# Altium PCB 24CH.PcbDoc (part 1 of 2)
Units mm, origin at the board's own origin, x right, y up, seen from the top; angles counter-clockwise.
Board outline 96.5 x 64.4 mm, 2 copper layers (F.Cu, B.Cu), stack 1.581 mm thick; 140 components, 144 nets, 455 pads, 160 vias.
Unrouted connection lines stored in the file: 94.
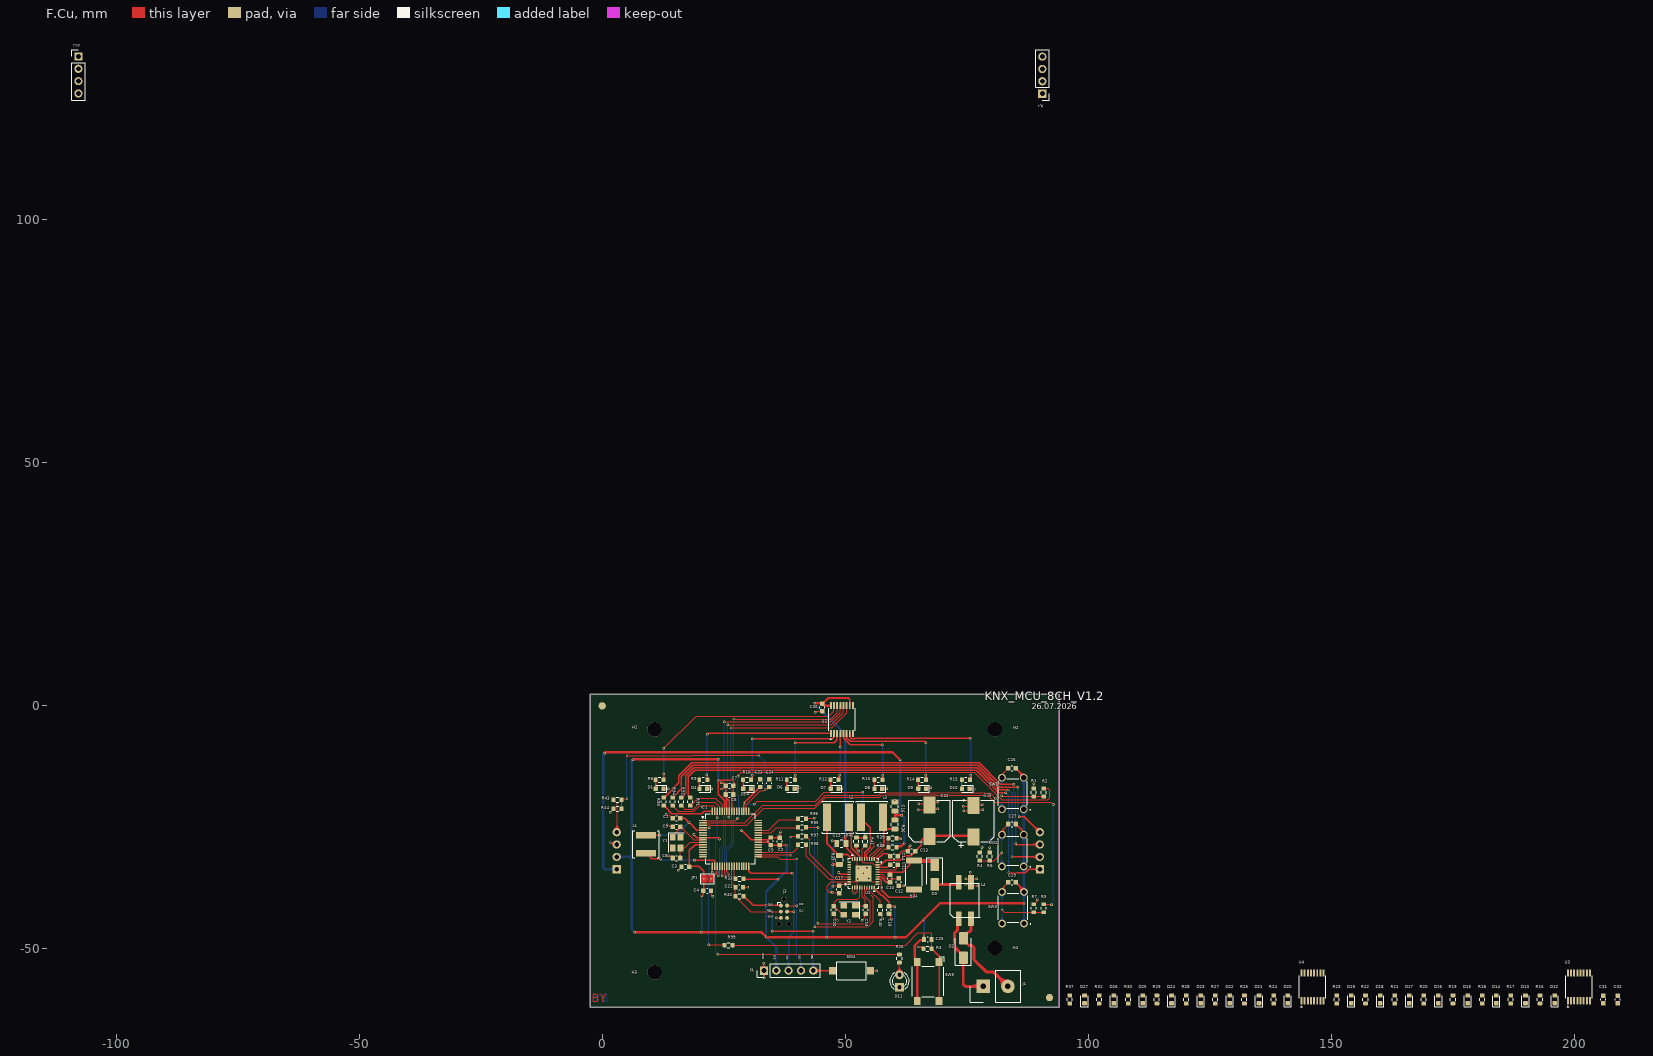
[diagram p0: F.Cu view]
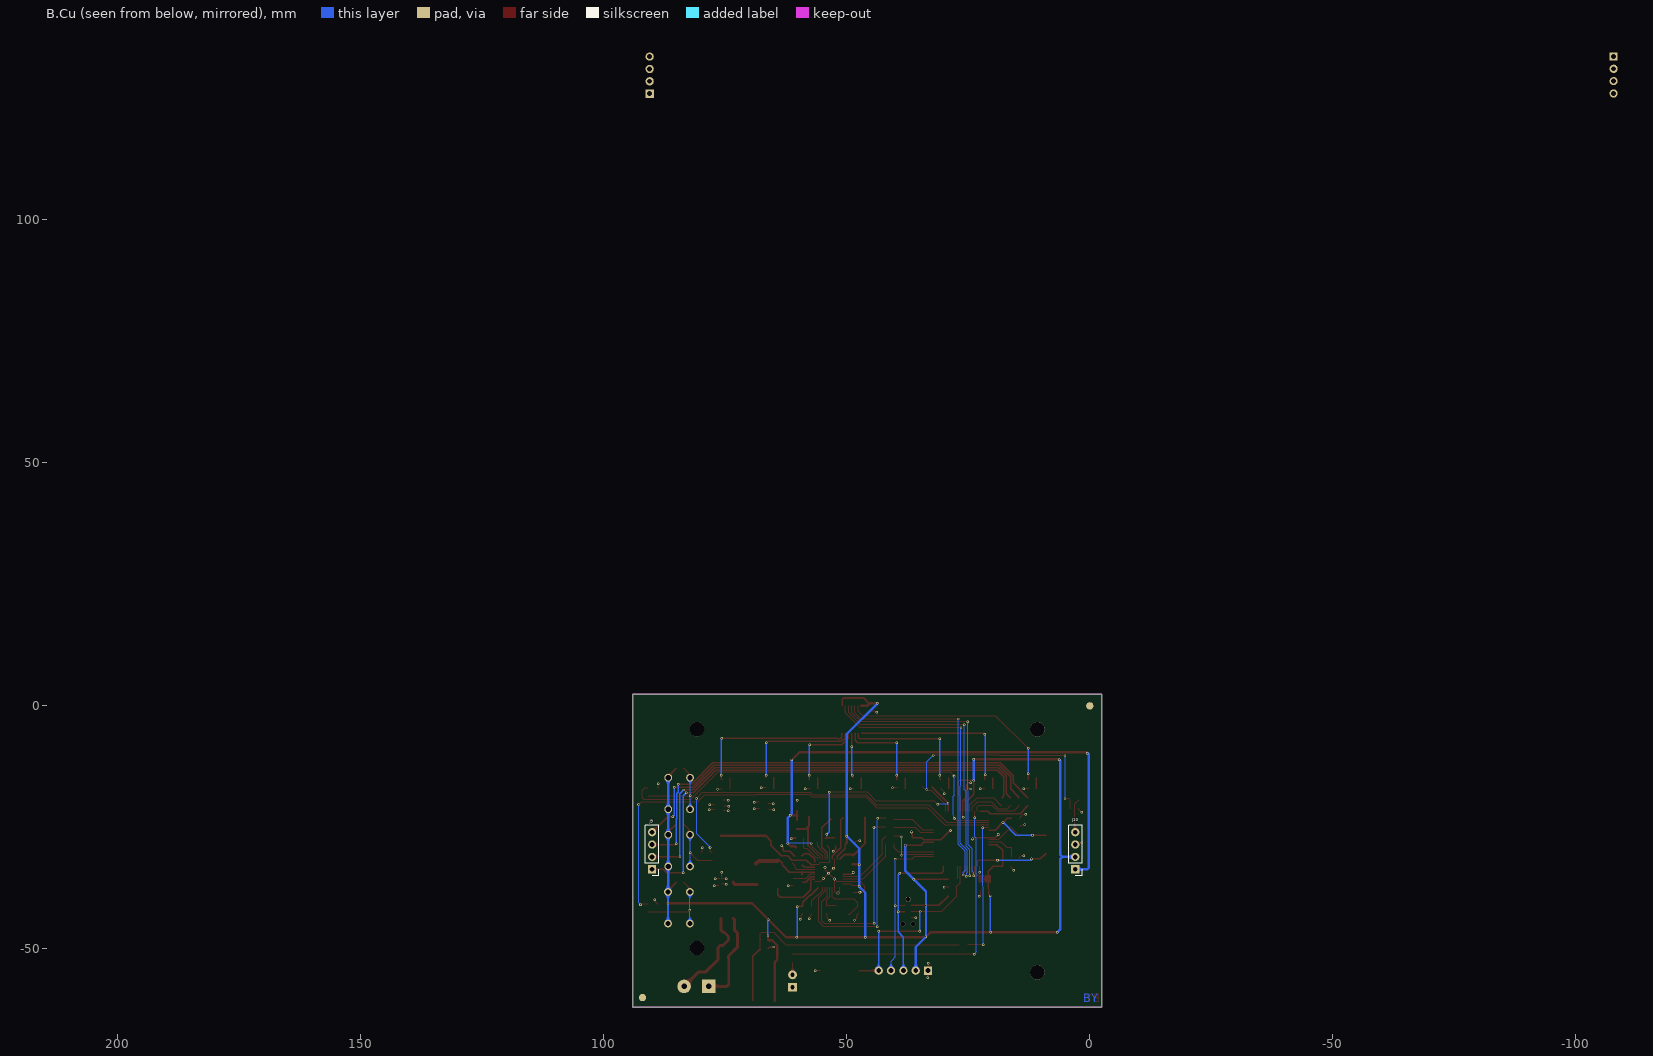
[diagram p1: B.Cu view, seen from below]

## Layer stack, top to bottom
F.Mask: solder mask 0.0102, Solder Resist, Dk 3.5
F.Cu: signal copper 0.0356
Dielectric 1: dielectric 1.51, FR-4, Dk 4.8
B.Cu: signal copper 0.0356
B.Mask: solder mask 0.0102, Solder Resist, Dk 3.5

## Board outline
-2.45,-62 -2.45,2.4 94.05,2.4 94.05,-62

## Design rules (kind name [scope] priority, off if disabled: settings)
Clearance "Clearence 0,5_Polygon" [InNamedPolygon('F.Cu--2') OR InNamedPolygon('B.Cu--2') OR InNamedPolygon('F.Cu--3') OR InNamedPolygon('B.Cu--3')] p1: gap=0.5 ignorepadtopadclearanceinfootprint=FALSE
Clearance "Clearence 0,4_Polygon" [InNamedPolygon('F.Cu--1') OR InNamedPolygon('B.Cu--1')] p2: gap=0.4 ignorepadtopadclearanceinfootprint=FALSE
Clearance "Clearence 0,3_Polygon" [InNamedPolygon('F.Cu-') OR InNamedPolygon('B.Cu-')] p3: gap=0.3 ignorepadtopadclearanceinfootprint=FALSE
Clearance [All] p4: gap=0.2 ignorepadtopadclearanceinfootprint=TRUE
ComponentClearance [All] p1: gap=0 collisioncheckmode=3 verticalgap=0.01 showdistances=FALSE
MinimumSolderMaskSliver [All] p1: minsoldermaskwidth=0
PolygonConnect Polygon_B.Cu--3_ConnectDirect [IsNamedPolygon('B.Cu--3') vs IsVia] p1: connectstyle=Direct reliefconductorwidth=0.254 reliefentries=4 polygonreliefangle="90 Angle" airgapwidth=0.254
PolygonConnect Polygon_B.Cu--3_ConnectRelief45 [IsNamedPolygon('B.Cu--3') vs (IsThruPin or IsSMTPin) and (PadShape_AllLayers = 'Round')] p2: connectstyle=Relief reliefconductorwidth=0.4 reliefentries=4 polygonreliefangle="45 Angle" airgapwidth=0.4
PolygonConnect Polygon_B.Cu--3_ConnectRelief90 [IsNamedPolygon('B.Cu--3') vs (IsThruPin or IsSMTPin) and (PadShape_AllLayers <> 'Round')] p3: connectstyle=Relief reliefconductorwidth=0.4 reliefentries=4 polygonreliefangle="90 Angle" airgapwidth=0.4
PolygonConnect Polygon_F.Cu--3_ConnectDirect [IsNamedPolygon('F.Cu--3') vs IsVia] p4: connectstyle=Direct reliefconductorwidth=0.254 reliefentries=4 polygonreliefangle="90 Angle" airgapwidth=0.254
PolygonConnect Polygon_F.Cu--3_ConnectRelief45 [IsNamedPolygon('F.Cu--3') vs (IsThruPin or IsSMTPin) and (PadShape_AllLayers = 'Round')] p5: connectstyle=Relief reliefconductorwidth=0.4 reliefentries=4 polygonreliefangle="45 Angle" airgapwidth=0.4
PolygonConnect Polygon_F.Cu--3_ConnectRelief90 [IsNamedPolygon('F.Cu--3') vs (IsThruPin or IsSMTPin) and (PadShape_AllLayers <> 'Round')] p6: connectstyle=Relief reliefconductorwidth=0.4 reliefentries=4 polygonreliefangle="90 Angle" airgapwidth=0.4
PolygonConnect Polygon_B.Cu--2_ConnectDirect [IsNamedPolygon('B.Cu--2') vs IsVia] p7: connectstyle=Direct reliefconductorwidth=0.254 reliefentries=4 polygonreliefangle="90 Angle" airgapwidth=0.254
PolygonConnect Polygon_B.Cu--2_ConnectRelief45 [IsNamedPolygon('B.Cu--2') vs (IsThruPin or IsSMTPin) and (PadShape_AllLayers = 'Round')] p8: connectstyle=Relief reliefconductorwidth=0.4 reliefentries=4 polygonreliefangle="45 Angle" airgapwidth=0.4
PolygonConnect Polygon_B.Cu--2_ConnectRelief90 [IsNamedPolygon('B.Cu--2') vs (IsThruPin or IsSMTPin) and (PadShape_AllLayers <> 'Round')] p9: connectstyle=Relief reliefconductorwidth=0.4 reliefentries=4 polygonreliefangle="90 Angle" airgapwidth=0.4
PolygonConnect Polygon_F.Cu--2_ConnectDirect [IsNamedPolygon('F.Cu--2') vs IsVia] p10: connectstyle=Direct reliefconductorwidth=0.254 reliefentries=4 polygonreliefangle="90 Angle" airgapwidth=0.254
PolygonConnect Polygon_F.Cu--2_ConnectRelief45 [IsNamedPolygon('F.Cu--2') vs (IsThruPin or IsSMTPin) and (PadShape_AllLayers = 'Round')] p11: connectstyle=Relief reliefconductorwidth=0.4 reliefentries=4 polygonreliefangle="45 Angle" airgapwidth=0.4
PolygonConnect Polygon_F.Cu--2_ConnectRelief90 [IsNamedPolygon('F.Cu--2') vs (IsThruPin or IsSMTPin) and (PadShape_AllLayers <> 'Round')] p12: connectstyle=Relief reliefconductorwidth=0.4 reliefentries=4 polygonreliefangle="90 Angle" airgapwidth=0.4
PolygonConnect Polygon_B.Cu--1_ConnectDirect [IsNamedPolygon('B.Cu--1') vs IsVia] p13: connectstyle=Direct reliefconductorwidth=0.254 reliefentries=4 polygonreliefangle="90 Angle" airgapwidth=0.254
PolygonConnect Polygon_B.Cu--1_ConnectRelief45 [IsNamedPolygon('B.Cu--1') vs (IsThruPin or IsSMTPin) and (PadShape_AllLayers = 'Round')] p14: connectstyle=Relief reliefconductorwidth=0.4 reliefentries=4 polygonreliefangle="45 Angle" airgapwidth=0.4
PolygonConnect Polygon_B.Cu--1_ConnectRelief90 [IsNamedPolygon('B.Cu--1') vs (IsThruPin or IsSMTPin) and (PadShape_AllLayers <> 'Round')] p15: connectstyle=Relief reliefconductorwidth=0.4 reliefentries=4 polygonreliefangle="90 Angle" airgapwidth=0.4
PolygonConnect Polygon_F.Cu--1_ConnectDirect [IsNamedPolygon('F.Cu--1') vs IsVia] p16: connectstyle=Direct reliefconductorwidth=0.254 reliefentries=4 polygonreliefangle="90 Angle" airgapwidth=0.254
PolygonConnect Polygon_F.Cu--1_ConnectRelief45 [IsNamedPolygon('F.Cu--1') vs (IsThruPin or IsSMTPin) and (PadShape_AllLayers = 'Round')] p17: connectstyle=Relief reliefconductorwidth=0.4 reliefentries=4 polygonreliefangle="45 Angle" airgapwidth=0.4
PolygonConnect Polygon_F.Cu--1_ConnectRelief90 [IsNamedPolygon('F.Cu--1') vs (IsThruPin or IsSMTPin) and (PadShape_AllLayers <> 'Round')] p18: connectstyle=Relief reliefconductorwidth=0.4 reliefentries=4 polygonreliefangle="90 Angle" airgapwidth=0.4
PolygonConnect Polygon_B.Cu-_ConnectDirect [IsNamedPolygon('B.Cu-') vs IsVia] p19: connectstyle=Direct reliefconductorwidth=0.254 reliefentries=4 polygonreliefangle="90 Angle" airgapwidth=0.254
PolygonConnect Polygon_B.Cu-_ConnectRelief45 [IsNamedPolygon('B.Cu-') vs (IsThruPin or IsSMTPin) and (PadShape_AllLayers = 'Round')] p20: connectstyle=Relief reliefconductorwidth=0.3 reliefentries=4 polygonreliefangle="45 Angle" airgapwidth=0.3
PolygonConnect Polygon_B.Cu-_ConnectRelief90 [IsNamedPolygon('B.Cu-') vs (IsThruPin or IsSMTPin) and (PadShape_AllLayers <> 'Round')] p21: connectstyle=Relief reliefconductorwidth=0.3 reliefentries=4 polygonreliefangle="90 Angle" airgapwidth=0.3
PolygonConnect Polygon_F.Cu-_ConnectDirect [IsNamedPolygon('F.Cu-') vs IsVia] p22: connectstyle=Direct reliefconductorwidth=0.254 reliefentries=4 polygonreliefangle="90 Angle" airgapwidth=0.254
PolygonConnect Polygon_F.Cu-_ConnectRelief45 [IsNamedPolygon('F.Cu-') vs (IsThruPin or IsSMTPin) and (PadShape_AllLayers = 'Round')] p23: connectstyle=Relief reliefconductorwidth=0.3 reliefentries=4 polygonreliefangle="45 Angle" airgapwidth=0.3
PolygonConnect Polygon_F.Cu-_ConnectRelief90 [IsNamedPolygon('F.Cu-') vs (IsThruPin or IsSMTPin) and (PadShape_AllLayers <> 'Round')] p24: connectstyle=Relief reliefconductorwidth=0.3 reliefentries=4 polygonreliefangle="90 Angle" airgapwidth=0.3
RoutingVias [All] p1: holewidth=0.711 width=1.27 viastyle="Through Hole" minholewidth=0.711 minwidth=1.27 maxholewidth=0.711 maxwidth=1.27
SilkToSilkClearance [All] p1: silktosilkclearance=0
SilkToSolderMaskClearance [IsPad] p1: minsilkscreentomaskgap=0 clearancetoexposedcopper=TRUE
SolderMaskExpansion [All] p1: expansion=0 istentingtop=FALSE
SupplyNets "Schematic Supply Nets_3" [InNet('+3V3')] p1: voltage=0.000
SupplyNets "Schematic Supply Nets_2" [InNet('GND')] p2: voltage=0.000
SupplyNets "Schematic Supply Nets" [InNet('+12V')] p3: voltage=0.000
Width [All] p1: maxlimit=10 minlimit=0.2 preferedwidth=0.254 minimp=50.000000 maximp=50.000000 favimp=50.000000
26 further rules are at their usual default settings.

## Classes and differential pairs
component class UI_BUTTON_LED: C26 C27 C29 C30 C31 C32 D1 D4 D5 D6 D7 D8 D9 D10 D12 D13 D14 D15 D16 D17 D18 D19 D20 D21 D22 D23 D24 D25 D26 D27 R1 R2 R4 R5 R6 R7 R8 R9 R10 R11 R12 R13 R14 R15 R16 R17 R18 R19 R20 R21 R22 R23 R24 R25 R27 R28 R29 R30 R31 R37 SW1 SW2 SW3 U2 U3 U4
component class "Transceiver for KNx": C10 C11 C12 C13 C14 C15 C16 C17 C18 C19 C20 C22 C28 D2 D3 L2 L3 L4 R34 R35 R36 R38 R39 R40 U1 Y2
component class MCU: C1 C2 C3 C4 C5 C6 C7 C8 C9 C21 IC1 JP1 L1 R32 R33 SW4 Y1
component class KNX-MCU-CONTROL_V0.2: C23 C24 C25 D11 H1 H2 H3 H4 J1 J2 J3 R3 R26 R41 R42 R43 R44 R95 R96 R97 R98 R99 SW5
component class Connectors: J9 J10 R91 R92 R93 R94

## Components (designator, comment, footprint, x,y, rotation, side; value= is the part's Value field where it differs from the comment)
C1 "4.7uF" C_0603_1608Metric#1 15.3,-23.1 r0 top
C2 "1uF" C_0603_1608Metric#1 36.508,-27.887 r270 top
C3 "100nF" C_0603_1608Metric#1 17.1,-33.1 r0 top
C4 "100nF" C_0603_1608Metric#1 21.6,-38 r180 top
C5 "100nF" C_0603_1608Metric#1 34.668,-27.857 r270 top
C6 "100nF" C_0603_1608Metric#1 26.218,-18.237 r0 top
C7 "2.2uF" C_0603_1608Metric#1 26.2,-16.4 r0 top
C8 "15pF" C_0603_1608Metric#1 15.3,-31.3 r180 top
C9 "15pF" C_0603_1608Metric#1 15.3,-24.9 r180 top
C10 "47nF" C_0603_1608Metric#1 59.2,-35.525 r90 top
C11 "220nF" C_0603_1608Metric#1 60,-32.7 r0 top
C12 "100nF" C_0603_1608Metric#1 61,-36.2 r90 top
C13 "100nF" C_0603_1608Metric#2 63.6,-29.9 r180 top
C14 "1uF" C_0603_1608Metric#1 60,-30.9 r180 top
C15 "10uF" C_0805_2012Metric 49.2,-28.3 r0 top
C16 "10uF" C_0805_2012Metric 60.2,-20.7 r270 top
C17 "100nF" C_0603_1608Metric#1 48.747,-37.752 r90 top
C18 "100nF" C_0603_1608Metric#1 59,-42 r90 top
C19 "10pF" C_0603_1608Metric#1 54.2,-42 r270 top
C20 "10pF" C_0603_1608Metric#1 47.6,-42 r270 top
C21 "100nF" C_0603_1608Metric#1 28.2,-37.3 r180 top
C22 "100uF" CP_Elec_8x10#1 67.3,-23.65 r90 top
C23 "100nF" C_0603_1608Metric#2 32.5,-15.9 r90 top
C24 "100nF" C_0603_1608Metric#2 34.4,-15.9 r90 top
C25 "100nF" C_0603_1608Metric#1 66.972,-48.043 r180 top
C26 "100nF" C_0603_1608Metric#1 84.3,-12.8 r180 top
C27 "100nF" C_0603_1608Metric#1 84.3,-24.3 r180 top
C28 "470uf/16V" CP_Elec_8x10#2 76.4,-23.7 r270 top
C29 "100nF" C_0603_1608Metric#1 84.3,-36.3 r180 top
C30 "100nF" C_0603_1608Metric#1 45.3,-0.3 r270 top
C31 "100nF" C_0603_1608Metric#2 205.913,-60.378 r90 top
C32 "100nF" C_0603_1608Metric#2 208.913,-60.378 r90 top
D1 "LED" LED_0603_1608Metric 11.8,-17.013 r180 top
D2 "SMAJ40CA-HT" D_SMA 74.3,-49.8 r90 top
D3 "SS28" D_SMA 68.4,-34.7 r270 top
D4 "LED" LED_0603_1608Metric 20.8,-17.013 r180 top
D5 "LED" LED_0603_1608Metric 29.8,-17.013 r180 top
D6 "LED" LED_0603_1608Metric 38.8,-17.013 r180 top
D7 "LED" LED_0603_1608Metric 47.8,-17.013 r180 top
D8 "LED" LED_0603_1608Metric 56.8,-17.013 r180 top
D9 "LED" LED_0603_1608Metric 65.8,-17.013 r180 top
D10 "LED" LED_0603_1608Metric 74.8,-17.013 r180 top
D11 "Led_Green" LED_D3.0mm 61.15,-57.87 r90 top locked
D12 "LED" LED_0603_1608Metric 195.913,-60.378 r90 top
D13 "LED" LED_0603_1608Metric 189.913,-60.378 r90 top
D14 "LED" LED_0603_1608Metric 183.913,-60.378 r90 top
D15 "LED" LED_0603_1608Metric 178.013,-60.378 r90 top
D16 "LED" LED_0603_1608Metric 172.013,-60.378 r90 top
D17 "LED" LED_0603_1608Metric 166.013,-60.378 r90 top
D18 "LED" LED_0603_1608Metric 160.013,-60.378 r90 top
D19 "LED" LED_0603_1608Metric 154.113,-60.378 r90 top
D20 "LED" LED_0603_1608Metric 141.013,-60.378 r90 top
D21 "LED" LED_0603_1608Metric 135.113,-60.378 r90 top
D22 "LED" LED_0603_1608Metric 129.113,-60.378 r90 top
D23 "LED" LED_0603_1608Metric 123.113,-60.378 r90 top
D24 "LED" LED_0603_1608Metric 117.113,-60.378 r90 top
D25 "LED" LED_0603_1608Metric 111.213,-60.378 r90 top
D26 "LED" LED_0603_1608Metric 105.213,-60.378 r90 top
D27 "LED" LED_0603_1608Metric 99.213,-60.378 r90 top
H1 "MountingHole" MountingHole_3mm 10.8,-4.8 r270 top
H2 "MountingHole" MountingHole_3mm 80.8,-4.8 r270 top
H3 "MountingHole" MountingHole_3mm 10.8,-54.8 r270 top
H4 "MountingHole" MountingHole_3mm 80.8,-49.8 r270 top
IC1 "R7FA2L1AB3CFM" LQFP-64_10x10mm_P0.5mm 26.413,-27.327 r0 top locked
J1 "L-KLS8-2170-13" Samtec_HPM-02-01-x-S_Straight_1x02_Pitch5.08mm 78.37,-57.7 r90 top locked
J2 "Conn_01x05" PinHeader_1x05_P2.54mm_Vertical 33.268,-54.457 r90 top
J3 "Conn_ARM_SWD_TagConnect_TC2030-NL" Tag-Connect_TC2030-IDC-NL_2x03_P1.27mm_Vertical 37.393,-42.327 r270 top
J9 "Conn_01x04" PinHeader_1x04_P2.54mm_Vertical#1 90.036,-33.604 r0 bottom locked
J9_1 "Comment" PinHeader_1x04_P2.54mm_Vertical#2 90.54,125.936 r180 top value=Conn_01x04
J10 "Conn_01x04" PinHeader_1x04_P2.54mm_Vertical#1 2.986,-33.604 r0 bottom locked
J10_1 "Comment" PinHeader_1x04_P2.54mm_Vertical#2 -107.74,133.596 r0 top value=Conn_01x04
JP1 "SolderJumper_2_Open" SolderJumper-2_P1.3mm_Open_TrianglePad1.0x1.5mm 21.628,-35.557 r0 top
L1 "4.7uH" L_APV_ANR5012 9.008,-28.467 r270 top
L2 "220uH" L_APV_ANR6028 48.5,-22.9 r180 top
L3 "220uH" L_APV_ANR6028 55.5,-22.9 r0 top
L4 "50474C" L_CommonMode_50474C_7.5x5.9mm 74.6,-40 r90 top
R1 "10k" R_0603_1608Metric 88.8,-17.8 r90 top
R2 "330R" R_0603_1608Metric 90.8,-17.8 r270 top
R3 "10K" R_0603_1608Metric 66.947,-49.943 r0 top
R4 "330R" R_0603_1608Metric 77.7,-31 r270 top
R5 "330R" R_0603_1608Metric 90.8,-41.625 r270 top
R6 "10k" R_0603_1608Metric 79.7,-31 r90 top
R7 "10k" R_0603_1608Metric 88.8,-41.625 r90 top
R8 "1k" R_0603_1608Metric 11.8,-15.2 r180 top
R9 "1k" R_0603_1608Metric 20.8,-15.2 r180 top
R10 "1k" R_0603_1608Metric 29.8,-15.2 r180 top
R11 "1k" R_0603_1608Metric 38.8,-15.2 r180 top
R12 "1k" R_0603_1608Metric 47.8,-15.2 r180 top
R13 "1k" R_0603_1608Metric 56.8,-15.2 r180 top
R14 "1k" R_0603_1608Metric 65.8,-15.2 r180 top
R15 "1k" R_0603_1608Metric 74.8,-15.2 r180 top
R16 "1k" R_0603_1608Metric 192.913,-60.378 r90 top
R17 "1k" R_0603_1608Metric 186.913,-60.378 r90 top
R18 "1k" R_0603_1608Metric 181.013,-60.378 r90 top
R19 "1k" R_0603_1608Metric 175.013,-60.378 r90 top
R20 "1k" R_0603_1608Metric 169.013,-60.378 r90 top
R21 "1k" R_0603_1608Metric 163.013,-60.378 r90 top
R22 "1k" R_0603_1608Metric 157.013,-60.378 r90 top
R23 "1k" R_0603_1608Metric 151.113,-60.378 r90 top
R24 "1k" R_0603_1608Metric 138.113,-60.378 r90 top
R25 "1k" R_0603_1608Metric 132.113,-60.378 r90 top
R26 "1K" R_0603_1608Metric 61.15,-51.97 r270 top
R27 "1k" R_0603_1608Metric 126.113,-60.378 r90 top
R28 "1k" R_0603_1608Metric 120.113,-60.378 r90 top
R29 "1k" R_0603_1608Metric 114.113,-60.378 r90 top
R30 "1k" R_0603_1608Metric 108.213,-60.378 r90 top
R31 "1k" R_0603_1608Metric 102.213,-60.378 r90 top
R32 "10K" R_0603_1608Metric 28.218,-39.157 r0 top
R33 "10K" R_0603_1608Metric 28.228,-35.557 r0 top
R34 "27R" R_2512_6332Metric 64.157,-34.772 r270 top
R35 "1R" R_0805_2012Metric 48.8,-31.7 r270 top
R36 "1R" R_0805_2012Metric 60.2,-24.4 r90 top
R37 "1k" R_0603_1608Metric 96.213,-60.378 r90 top
R38 "91K" R_0603_1608Metric 59.7,-29.1 r180 top
R39 "10K" R_0603_1608Metric 59.7,-27.2 r0 top
R40 "20k" R_0603_1608Metric 57.197,-42.022 r90 top
R41 "220k" R_0603_1608Metric 54.1,-27.9 r90 top
R42 "27k" R_0603_1608Metric 52.3,-27.9 r270 top
R43 "100k" R_0603_1608Metric 3.152,-19.333 r0 top
R44 "27k" R_0603_1608Metric 3.172,-21.143 r180 top
R91 "33R" R_0603_1608Metric 18.1,-19.7 r90 top
R92 "33R" R_0603_1608Metric 16.3,-19.7 r90 top
R93 "33R" R_0603_1608Metric 12.7,-19.7 r90 top
R94 "33R" R_0603_1608Metric 14.5,-19.7 r90 top
R95 "33R" R_0603_1608Metric 41.1,-25 r180 top
R96 "33R" R_0603_1608Metric 41.1,-23.2 r180 top
R97 "33R" R_0603_1608Metric 41.1,-26.8 r180 top
R98 "33R" R_0603_1608Metric 41.1,-28.6 r180 top
R99 "330R" R_0603_1608Metric 26,-49.2 r180 top
SW1 "TL1105BF160Q" TL1105 84.468,-18.017 r90 top locked
SW2 "TL1105BF160Q" TL1105 84.468,-29.767 r90 top locked
SW3 "TL1105BF160Q" TL1105 84.518,-41.517 r90 top locked
SW4 "SW_Push" SW_SPST_CK_RS282G05A3 51.3,-54.5 r0 top
SW5 "SW_Push" SW_SPST_Omron_B3FS-100xP 67.04,-56.7 r270 top locked
U1 "NCN5130MNTWG" QFN40_485AU-01_ONS 53.717,-34.432 r180 top locked
U2 "74HC595PW,118" TSSOP-16_4.4x5mm_P0.65mm 49.3,-2.8 r90 top
U3 "74HC595PW,118" TSSOP-16_4.4x5mm_P0.65mm 200.913,-57.778 r90 top
U4 "74HC595PW,118" TSSOP-16_4.4x5mm_P0.65mm 146.113,-57.778 r90 top
Y1 "20Mhz" Crystal_SMD_SeikoEpson_FA238-4Pin_3.2x2.5mm 15.308,-28.102 r270 top
Y2 "16Mhz" Crystal_SMD_SeikoEpson_FA238V-4Pin_3.2x2.5mm 50.907,-42.022 r180 top

## Footprints (in the part's own frame and the unit in brackets; to place one, negate y for a bottom-side part, rotate by r counter-clockwise, add the part's x,y. Pads: shape width x height; smd on the part's side, far side on the other; paste and mask are expansions set on the pad)
C_0603_1608Metric#1 [mm]
  rrect25% 0.9x0.95 smd mask+0.05: 1(-0.775,0) 2(0.775,0)
  silkscreen extent -0.14,-0.51 0.14,0.51
C_0603_1608Metric#2 [mm]
  rrect25% 0.9x0.95 smd mask+0.05: 1(0.775,0) 2(-0.775,0)
  silkscreen extent -0.14,-0.51 0.14,0.51
C_0805_2012Metric [mm]
  rrect25% 1x1.45 smd mask+0.05: 1(-0.95,0) 2(0.95,0)
  silkscreen extent -0.26,-0.73 0.26,0.73
CP_Elec_8x10#1 [mm]
  rrect10% 3.5x2.5 smd mask+0.05: 1(-3.25,0) 2(3.25,0)
  silkscreen extent -4.26,-4.26 4.26,4.26
CP_Elec_8x10#2 [mm]
  rrect10% 3.5x2.5 smd mask+0.05: 1(3.25,0) 2(-3.25,0)
  silkscreen extent -4.26,-4.26 5.5,4.26
Crystal_SMD_SeikoEpson_FA238-4Pin_3.2x2.5mm [mm]
  rect 1.4x1.2 smd mask+0.05: 1(-1.1,-0.8) 2(1.1,0.8) 3(1.1,-0.8) 4(-1.1,0.8)
  silkscreen extent -2,-1.6 2,1.6
Crystal_SMD_SeikoEpson_FA238V-4Pin_3.2x2.5mm [mm]
  rect 1.4x1.2 smd mask+0.05: 1(-1.2,-0.95) 2(1.2,-0.95) 3(1.2,0.95) 4(-1.2,0.95)
  silkscreen extent -2.1,-1.75 2.1,1.75
D_SMA [mm]
  rrect14% 2.5x1.8 smd mask+0.05: 1(-2,0) 2(2,0)
  silkscreen extent -3.51,-1.65 2,1.65
L_APV_ANR5012 [mm]
  rrect18% 1.4x4.2 smd mask+0.05: 1(-1.85,0) 2(1.85,0)
  silkscreen extent -2.76,-2.76 2.76,2.76
L_APV_ANR6028 [mm]
  rrect15% 1.7x5.7 smd mask+0.05: 1(-2.25,0) 2(2.25,0)
  silkscreen extent -3.26,-3.26 3.26,3.26
L_CommonMode_50474C_7.5x5.9mm [mm]
  rrect20% 3x1.2 smd mask+0.05: 1(-3.75,1.25) 2(-3.75,-1.25) 3(3.75,-1.25) 4(3.75,1.25)
  silkscreen extent -3.5,-3.14 3.5,3
LED_0603_1608Metric [mm]
  rrect25% 0.875x0.95 smd mask+0.05: 1(-0.787,0) 2(0.787,0)
  silkscreen extent -1.49,-0.73 0.8,0.73
LED_D3.0mm [mm]
  rect 1.8x1.8 hole 0.9 mask+0.05: 1(0,0)
  round 1.8 hole 0.9 mask+0.05: 2(2.54,0)
  silkscreen extent -0.29,-1.99 2.94,1.99
LQFP-64_10x10mm_P0.5mm [mm]
  rrect25% 1.55x0.3 smd mask+0.05: 1(-5.675,3.75) 2(-5.675,3.25) 3(-5.675,2.75) 4(-5.675,2.25) 5(-5.675,1.75) 6(-5.675,1.25) 7(-5.675,0.75) 8(-5.675,0.25) 9(-5.675,-0.25) 10(-5.675,-0.75) 11(-5.675,-1.25) 12(-5.675,-1.75) 13(-5.675,-2.25) 14(-5.675,-2.75) 15(-5.675,-3.25) 16(-5.675,-3.75) 33(5.675,-3.75) 34(5.675,-3.25) 35(5.675,-2.75) 36(5.675,-2.25) 37(5.675,-1.75) 38(5.675,-1.25) 39(5.675,-0.75) 40(5.675,-0.25) 41(5.675,0.25) 42(5.675,0.75) 43(5.675,1.25) 44(5.675,1.75) 45(5.675,2.25) 46(5.675,2.75) 47(5.675,3.25) 48(5.675,3.75)
  rrect25% 0.3x1.55 smd mask+0.05: 17(-3.75,-5.675) 18(-3.25,-5.675) 19(-2.75,-5.675) 20(-2.25,-5.675) 21(-1.75,-5.675) 22(-1.25,-5.675) 23(-0.75,-5.675) 24(-0.25,-5.675) 25(0.25,-5.675) 26(0.75,-5.675) 27(1.25,-5.675) 28(1.75,-5.675) 29(2.25,-5.675) 30(2.75,-5.675) 31(3.25,-5.675) 32(3.75,-5.675) 49(3.75,5.675) 50(3.25,5.675) 51(2.75,5.675) 52(2.25,5.675) 53(1.75,5.675) 54(1.25,5.675) 55(0.75,5.675) 56(0.25,5.675) 57(-0.25,5.675) 58(-0.75,5.675) 59(-1.25,5.675) 60(-1.75,5.675) 61(-2.25,5.675) 62(-2.75,5.675) 63(-3.25,5.675) 64(-3.75,5.675)
  silkscreen extent -6.06,-5.11 5.11,5.11
MountingHole_3mm [mm]
  round 3 hole 3 mask+0.05: Un1(0,0)
PinHeader_1x04_P2.54mm_Vertical#1 [mm]
  rect 1.7x1.7 hole 1 mask+0.05: 1(0,0)
  round 1.7 hole 1 mask+0.05: 2(0,-2.54) 3(0,-5.08) 4(0,-7.62)
  silkscreen extent -1.38,-9 1.38,1.38
PinHeader_1x04_P2.54mm_Vertical#2 [mm]
  rect 1.7x1.7 hole 1 mask+0: 1(0,0)
  round 1.7 hole 1 mask+0: 2(0,-2.54) 3(0,-5.08) 4(0,-7.62)
  silkscreen extent -1.38,-9 1.38,1.38
PinHeader_1x05_P2.54mm_Vertical [mm]
  rect 1.7x1.7 hole 1 mask+0.05: 1(0,0)
  round 1.7 hole 1 mask+0.05: 2(0,-2.54) 3(0,-5.08) 4(0,-7.62) 5(0,-10.16)
  silkscreen extent -1.38,-11.54 1.38,1.38
QFN40_485AU-01_ONS [mil]
  rect 32x10 smd mask+1.97: 1(-114,88.58) 2(-114,68.9) 3(-114,49.21) 4(-114,29.53) 5(-114,9.84) 6(-114,-9.84) 7(-114,-29.53) 8(-114,-49.21) 9(-114,-68.9) 10(-114,-88.58) 21(114,-88.58) 22(114,-68.9) 23(114,-49.21) 24(114,-29.53) 25(114,-9.84) 26(114,9.84) 27(114,29.53) 28(114,49.21) 29(114,68.9) 30(114,88.58)
  rect 10x32 smd mask+1.97: 11(-88.58,-114) 12(-68.9,-114) 13(-49.21,-114) 14(-29.53,-114) 15(-9.84,-114) 16(9.84,-114) 17(29.53,-114) 18(49.21,-114) 19(68.9,-114) 20(88.58,-114) 31(88.58,114) 32(68.9,114) 33(49.21,114) 34(29.53,114) 35(9.84,114) 36(-9.84,114) 37(-29.53,114) 38(-49.21,114) 39(-68.9,114) 40(-88.58,114)
  rect 130x130 smd mask+1.97: 41(0,0)
  silkscreen extent -150,-150 150,150
R_0603_1608Metric [mm]
  rrect25% 0.8x0.95 smd mask+0.05: 1(-0.825,0) 2(0.825,0)
  silkscreen extent -0.24,-0.52 0.24,0.52
R_0805_2012Metric [mm]
  rrect24% 1.025x1.4 smd mask+0.05: 1(-0.913,0) 2(0.913,0)
  silkscreen extent -0.23,-0.73 0.23,0.73
R_2512_6332Metric [mm]
  rrect20% 1.225x3.35 smd mask+0.05: 1(-2.963,0) 2(2.963,0)
  silkscreen extent -2.18,-1.71 2.18,1.71
Samtec_HPM-02-01-x-S_Straight_1x02_Pitch5.08mm [mm]
  rect 2.8x2.8 hole 1.1 mask+0.05: 1(0,0)
  round 2.8 hole 1.1 mask+0.05: 2(0,-5.08)
  silkscreen extent -3.28,-7.73 3.28,2.65
SolderJumper-2_P1.3mm_Open_TrianglePad1.0x1.5mm [mm]
  rect 0.3x0.3 smd paste-0.3 mask+0.05: 1(-0.725,0) 2(0.725,0)
  F.Cu region: 0.275,0 -0.225,-0.75 -1.225,-0.75 -1.225,0.75 -0.225,0.75
  F.Cu region: 1.225,-0.75 0.075,-0.75 0.575,0 0.075,0.75 1.225,0.75
  silkscreen extent -1.4,-1 1.4,1
SW_SPST_CK_RS282G05A3 [mm]
  rect 1.5x1.5 smd mask+0.05: 1(-3.9,0) 2(3.9,0)
  silkscreen extent -3.06,-1.85 3.06,1.85
SW_SPST_Omron_B3FS-100xP [mm]
  rect 1.6x1.4 smd mask+0.05: 1(-4,2.25) 1(4,2.25) 2(-4,-2.25) 2(4,-2.25)
  silkscreen extent -5.1,-3.25 3.1,3.3
Tag-Connect_TC2030-IDC-NL_2x03_P1.27mm_Vertical [mil]
  round 31 smd paste-31 mask+1.97: 1(-50,-25) 2(-50,25) 3(0,-25) 4(0,25) 5(50,-25) 6(50,25)
  round 39 hole 39 mask+1.97: Un1(-100,0) Un2(100,40) Un3(100,-40)
  silkscreen extent -75,-50 -50,-25
TL1105 [mm]
  round 1.6 hole 1.06: 1(-3.25,-2.25) 2(3.25,-2.25) 3(-3.25,2.25) 4(3.25,2.25)
  silkscreen extent -3.4,-3.64 3,3, body extent -3.95,-3 3.95,3, height 9.47
TSSOP-16_4.4x5mm_P0.65mm [mm]
  rrect25% 1.475x0.4 smd mask+0.05: 1(-2.863,2.275) 2(-2.863,1.625) 3(-2.863,0.975) 4(-2.863,0.325) 5(-2.863,-0.325) 6(-2.863,-0.975) 7(-2.863,-1.625) 8(-2.863,-2.275) 9(2.863,-2.275) 10(2.863,-1.625) 11(2.863,-0.975) 12(2.863,-0.325) 13(2.863,0.325) 14(2.863,0.975) 15(2.863,1.625) 16(2.863,2.275)
  silkscreen extent -4.19,-2.74 2.31,2.74

## Part data
C1 C2 C3 C4 C5 C6 C7 C10 C11 C14 C21 C25 C26 C27 C29: library part C_3, Package=C_0603
  C1: MF="Samsung Electro-Mechanics", MP=CL10B475KQ8NQNC, OZD=C1608X7S1A475K080AC
  C2 C14: MF="Samsung Electro-Mechanics", MP=CL10B105KP8NNNC, OZD=CL10B105KP8NNNC
  C3 C4 C5 C6 C21 C25 C26 C27 C29: MF=YAGEO, MP=CC0603KRX7R9BB104
  C7: MF="Samsung Electro-Mechanics", MP=CL10B225KP8NNNC, OZD=CL10B225KP8NNNC
  C10: MF=SAMSUNG, MP=CL10B473KB8NNNC, OZD=CL10B473KB8NNNC
  C11: MF="Samsung Electro-Mechanics", MP=CL10B224KB8NNNC, OZD=CL10B224KB8NNNC
C8 C9 C19 C20: library part 20pF_0402_50V_5%, Package=C0603, MF="Samsung Electro-Mechanics"
  C8 C9: MP=CL10C150JB8NNNC, OZD=CL10C150JB8NNNC
  C19 C20: MP=CL10C100JB8NNNC, OZD=CL10C100JB8NNNC
C12 C13 C17 C18 C23 C24 C30 C31 C32: library part C_1, Package=C_0603
  C12 C13 C17 C18 C23 C24: MF="Samsung Electro-Mechanics", MP=CL10B104KB8NNNC
  C30 C31 C32: MF=YAGEO, MP=CC0603KRX7R9BB104
C15 C16: library part C_3, Package=C_0805, MF="Samsung Electro-Mechanics", MP=CL21B106KOQNNNE, OZD=CL21B106KOQNNNE
C22: library part C_US, Package="Radial D8 L10", MF=SUSCON, MP=CD035M101F10PKKKV00A
C28: library part C_US, OZD=EEEFK1C471P
D1 D4 D5 D6 D7 D8 D9 D10 D12 D13 D14 D15 D16 D17 D18 D19 D20 D21 D22 D23 D24 D25 D26 D27: Package=L_0603, MF=LITEON, MP=LTST-C190KFKT-5A, Sim.Pins="1=K 2=A"
D2: library part D_TVS, Package="DO214AC (SMA)", MF=HOTTECH, MP=SMAJ40CA-HT, OZD=SMAJ40CA-HT
D3: Package="DO214AC (SMA)", MF=HOTTECH, MP=SS18-HT, OZD=SS18-HT
D11: library part LED, Package="Through Hole,D=3mm", MF=TUOZHAN, MP=TZ-L2-03YYBYG1GDJ30-001, OZD=FYL-5014UBC1C-1MA-TR13
IC1: Package=LFQFP-64(10x10), MF=RENESAS, MP=R7FA2L1AB3CFM
J1: library part Screw_Terminal_01x02, Package="THT V/T", MF="KLS ELECTRONIC", MP=L-KLS8-2170-13, OZD=L-KLS8-2170-13
J9_1 J10_1: library part PinHeader_1x04_P2.54mm_Vertical, "Through hole straight pin header, 1x04, 2.54mm pitch, single row", Description="Generic connector, single row, 01x04, script generated (kicad-library-utils/schlib/autogen/connector/)", ki_fp_filters=Connector*:*_1x??_*
  J10_1: KiLib_Generator=connector/pin_header_socket
L1 L2 L3: library part L, Package="Non Standard"
  L1: Field6=NRS5030T4R7MMGJV, MF=VIKING, MP=PCD0302MT4R7, OZD=PCD0302MT4R7
  L2 L3: MF="CORE MASTER", MP=NR6028-221M
L4: library part Choke_Wurth_WE-CNSW_744232090, Package=SMD-4P,7x5.9mm, MF=muRata, MP=50474C, OZD=50474C
R1 R2 R4 R5 R6 R7 R8 R9 R10 R11 R12 R13 R14 R15 R16 R17 R18 R19 R20 R21 R22 R23 R24 R25 R27 R28 R29 R30 R31 R37: library part R, Package=R_0603
  R1 R6 R7: MF=FOJAN, MP=FRC0603J103TS
  R2 R4 R5: MF=FOJAN, MP="FRC0603J331 TS"
  R8 R9 R10 R11 R12 R13 R14 R15 R16 R17 R18 R19 R20 R21 R22 R23 R24 R25 R27 R28 R29 R30 R31 R37: MF=YAGEO, MP=RC0603JR-071KL
R3 R32 R33 R38 R39 R40 R41 R42 R43 R44 R91 R92 R93 R94 R95 R96 R97 R98 R99: library part R_US, Package=R_0603
  R3 R32 R33: MF=FOJAN, MP=FRC0603J103TS
  R38: MF=ROYALOHM, MP=0603SAF9102T5E, OZD=0603SAF9102T5E
  R39: MF=ROYALOHM, MP=PS03W4F1002T5E, OZD=PS03W4F1002T5E
  R40: MF=ROYALOHM, MP=0603SAF2002T5E, OZD=0603SAF2002T5E
  R41: MF=PANASONIC, MP=ERJ3EKF2203V
  R42 R44: MF=PANASONIC, MP=ERJ3EKF2702V
  R43: MF=YAGEO, MP=RC0603FR-07100KL
  R91 R92 R93 R94: MF=YAGEO, MP=RC0603JR-0733RL
  R95 R96 R97 R98: MF=ROYALOHM, MP=0603SAF330JT5E, OZD=0603SAF330JT5E
  R99: MF=FOJAN, MP="FRC0603J331 TS"
R26: library part R_7, Package=R0603, MF=VO, MP=SCR0603J1K
R34: library part R_US, Package=R_2512, MF=ROYALOHM, MP=HP122WF270JT4E, OZD=HP122WF270JT4E
R35 R36: library part R_US, Package=R_0805, MF=PANASONIC, MP=ERJ6RQF1R0V, OZD=ERJ6RQF1R0V
SW1 SW2 SW3: "Switch", Manufacturer_Name=E-Switch, Mouser Part Number=612-TL1105B, Datasheet Link=https://configured-product-images.s3.amazonaws.com/2D/specs/TL1105BF160Q.pdf, Manufacturer_Part_Number=TL1105BF160Q, Mouser Price/Stock=https://www.mouser.co.uk/ProductDetail/E-Switch/TL1105BF160Q?qs=YXf4ACKMM4xZnIL%2FJEeFtQ%3D%3D
SW5: Package=SMD,12x12mm, MF=kinghelm, MP=KH-12X12X8H-SMT
U1: Package=QFN-40-EP(6x6), MF=onsemi, MP=NCN5130MNTWG
U2 U3 U4: library part 74HC595, Package=TSSOP-16, MF=Nexperia, MP=74HC595PW,118
Y1: library part Crystal, Package="4-SMD 3225", MF=RALTRON, MP=FL3P2X2P5SSC, OZD=RH100-20.000-10-1010-TR
Y2: library part Crystal, Package=4-SMD, MF=RALTRON, MP=RH100-16.000-10-1010-EXT, OZD=RH100-16.000-10-1010-EXT

## Free pads (board coordinates)
  round 1.5 smd mask+1: 2(0,0) 3(92,-60)
  round 1.5 smd far side mask+1: 4(92,-60) 5(0,0)

## Via types
v1: diameter 0.5, hole 0.3, F.Cu to B.Cu, tented both sides, 135 vias
v2: diameter 0.6, hole 0.35, F.Cu to B.Cu, tented both sides, 25 vias

## Nets (pads, with @x,y where several pads share a name; then routed paths per layer and width w, separated by ;. In a path a pad name is that pad's centre, name@x,y a point inside that pad or via, vN(x,y) a via of type N, cw(c..) or ccw(c..) an arc to the next point about the centre after c; other vN are vias at no path point)
+3V3: C2.2 C3.2 C4.2 C5.2 C6.2 C7.2 C15.2 C17.2 C18.2 C25.2 C26.1 C27.1 C29.1 C30.1 C31.1 C32.1 IC1.11 IC1.39 IC1.56 IC1.59 J2.2 J3.1 J10.2 JP1.1 R32.2 R33.2 R35.2 SW1.1 SW1.2 SW2.1 SW2.2 SW3.1 SW3.2 SW5.2 U1.19 U1.30 U1.40 U2.10 U2.16 U3.10 U4.10 U4.16 | length 376.2
  F.Cu w0.254: v1(47.457,-37.122) 47.602,-36.977 C17.2@48.747,-36.977 49.042,-36.682 U1.30@50.821,-36.682
  F.Cu w0.3: v1(20.5,-39.1) 20.825,-38.775 C4.2@20.825,-38 ; IC1.11@20.738,-28.577 19.108,-28.577 17.953,-29.732 17.953,-32.957 19.857,-32.957 20.903,-34.003 JP1.1@20.903,-35.557 20.903,-37.652 C4.2@20.818,-37.737 ; IC1.59@25.163,-21.652 25.163,-19.463 23.873,-18.173 23.873,-15.381 v1(23.9,-15.354) 23.938,-15.316 24.19,-15.316 24.251,-15.254 26.838,-15.254 27.013,-15.43 27.013,-16.537 26.993,-16.557 C6.2@26.993,-18.237 26.663,-18.567 IC1.56@26.663,-21.652 ; R32.2@29.043,-39.157 29.128,-39.157 31.028,-41.057 v1(33.7,-41.057) J3.1@36.758,-41.057 ; R33.2@29.053,-35.557 29.197,-35.7 v1(36.185,-35.7) v1@36.2,-35.7 ; IC1.39@32.088,-28.077 34.113,-28.077 C5.2@34.668,-28.632 36.478,-28.632 C2.2@36.508,-28.662 37.773,-28.662 v2@37.828,-28.607 ; C15.2@50.15,-28.3 50.335,-28.485 50.335,-29.299 51.967,-30.931 U1.19@51.967,-31.536 ; U1.40@55.967,-37.327 55.967,-37.561 57.378,-38.972 57.612,-38.972 59,-40.36 C18.2@59,-41.225 60.125,-41.225 v1(60.2,-41.3) ; C29.1@85.075,-36.3 85.075,-36.325 86.768,-38.018 SW3.2@86.768,-38.267 ; C27.1@85.075,-24.3 85.075,-24.325 86.47,-25.72 86.47,-26.268 SW2.2@86.718,-26.517 ; C26.1@85.075,-12.8 85.075,-12.825 86.718,-14.468 SW1.2@86.718,-14.767
  F.Cu w0.4: C30.1@45.3,0.475 45.325,0.475 46.45,1.6 50.691,1.6 50.925,1.366 U2.10@50.925,0.062
  F.Cu w0.5: v1(6.3,-11.1) 6.4,-11 v1(23.9,-11) ; v1(6.7,-46.6) v1(20.4,-46.6) 32.8,-46.6 v1(33.7,-47.5) 33.8,-47.6 v1(46.2,-47.6) v1(60.3,-47.6) 62.5,-47.6 v1(66.1,-44) 69.5,-40.6 v1(86.768,-40.6) v1@86.8,-40.6 ; v1(43.7,0.5) 45.275,0.5 C30.1@45.3,0.475 ; C30.1@45.325,0.475 45.737,0.062 U2.16@47.025,0.062 ; v1(47.4,-32.7) 47.487,-32.612 R35.2@48.8,-32.612 ; v1(50,-26.8) 50,-28.15 C15.2@50.15,-28.3 ; SW5.2@64.79,-60.7 SW5.2@64.79,-52.7 64.34,-52.25 64.34,-51.897 64.3,-51.857 64.3,-49.31 65.422,-48.188 66.051,-48.188 C25.2@66.197,-48.043 v1(66.197,-47.313)
  B.Cu w0.3: v1(20.4,-46.6) 20.5,-46.5 v1(20.5,-39.1) ; v1(60.2,-41.3) 60.2,-47.5 v1(60.3,-47.6) ; v1(66.1,-44) 66.138,-44.038 66.138,-44.18 66.197,-44.238 66.197,-45.686 v1(66.197,-47.313)
  B.Cu w0.5: J10.2@2.986,-31.064 5.636,-31.064 ; v1(6.3,-11.1) 6.1,-11.3 6.1,-30.6 5.636,-31.064 ; v1(6.7,-46.6) 6.1,-46 6.1,-31.527 5.636,-31.064 ; v1(23.9,-15.354) v1(23.9,-11) ; J2.2@35.808,-54.457 35.808,-49.608 v1(33.7,-47.5) v1(33.7,-41.057) 33.7,-38.185 v1(36.185,-35.7) 37.928,-33.957 v2(37.928,-28.707) ; v1(43.7,0.5) 50,-5.8 v1(50,-26.8) 47.4,-29.4 v1(47.4,-32.7) 47.457,-32.757 v1(47.457,-37.122) 46.2,-38.378 v1(46.2,-47.6) ; SW1.2@86.718,-14.767 SW1.1@86.718,-21.267 SW2.2@86.718,-26.517 SW2.1@86.718,-33.017 86.743,-33.042 86.743,-38.242 SW3.2@86.768,-38.267 v1(86.768,-40.6) SW3.1@86.768,-44.767
+12V: C16.2 J10.1 R36.2 R38.1 U1.13 | length 120
  F.Cu w0.254: U1.13@54.967,-31.536 54.967,-30.904 55.518,-30.353 55.708,-30.353 57.253,-28.808 57.253,-28.347 v1(57.3,-28.3)
  F.Cu w0.4: R36.2@60.2,-23.487 60.2,-22.569 C16.2@60.2,-21.65
  F.Cu w0.5: v1(0.5,-9.7) 0.7,-9.5 59.675,-9.5 v1(61.3,-11.125) ; 60.2,-22.569 60.269,-22.5 v1(61.6,-22.5) ; R38.1@60.525,-29.1 60.525,-29.025 60.675,-28.875 61.525,-28.875 v1(62.1,-28.3)
  B.Cu w0.254: v1(57.3,-28.3) v1(62.1,-28.3)
  B.Cu w0.5: v1(0.5,-9.7) 0.2,-10 0.2,-33.3 0.504,-33.604 J10.1@2.986,-33.604 ; v1(61.3,-11.125) 61.3,-22.2 v1(61.6,-22.5) 62.1,-23 v1(62.1,-28.3)
-A: D2.2 J1.2 L4.2 | length 19.8
  F.Cu w0.6: L4.2@75.85,-43.75 75.85,-46.15 75.499,-46.501 75.249,-46.501 74.3,-47.45 D2.2@74.3,-47.8 74.3,-48.15 75.426,-49.276 76.076,-49.276 76.5,-49.7 76.5,-52.2 79,-54.7 80.45,-54.7 J1.2@83.45,-57.7
A: D2.1 J1.1 L4.1 | length 18.9
  F.Cu w0.6: L4.1@73.35,-43.75 73.05,-44.05 73.05,-46.15 72.5,-46.7 72.5,-49.65 74.3,-51.45 D2.1@74.3,-51.8 74.269,-51.831 74.269,-57.269 74.7,-57.7 J1.1@78.37,-57.7